# Altium PCB PCB1.PcbDoc
Units mil, origin at the board's own origin, x right, y up, seen from the top; angles counter-clockwise.
Board outline 2362.2 x 2362.2 mil, 2 copper layers (Top Layer, Bottom Layer); 25 components, 20 nets, 72 pads, 3 vias.
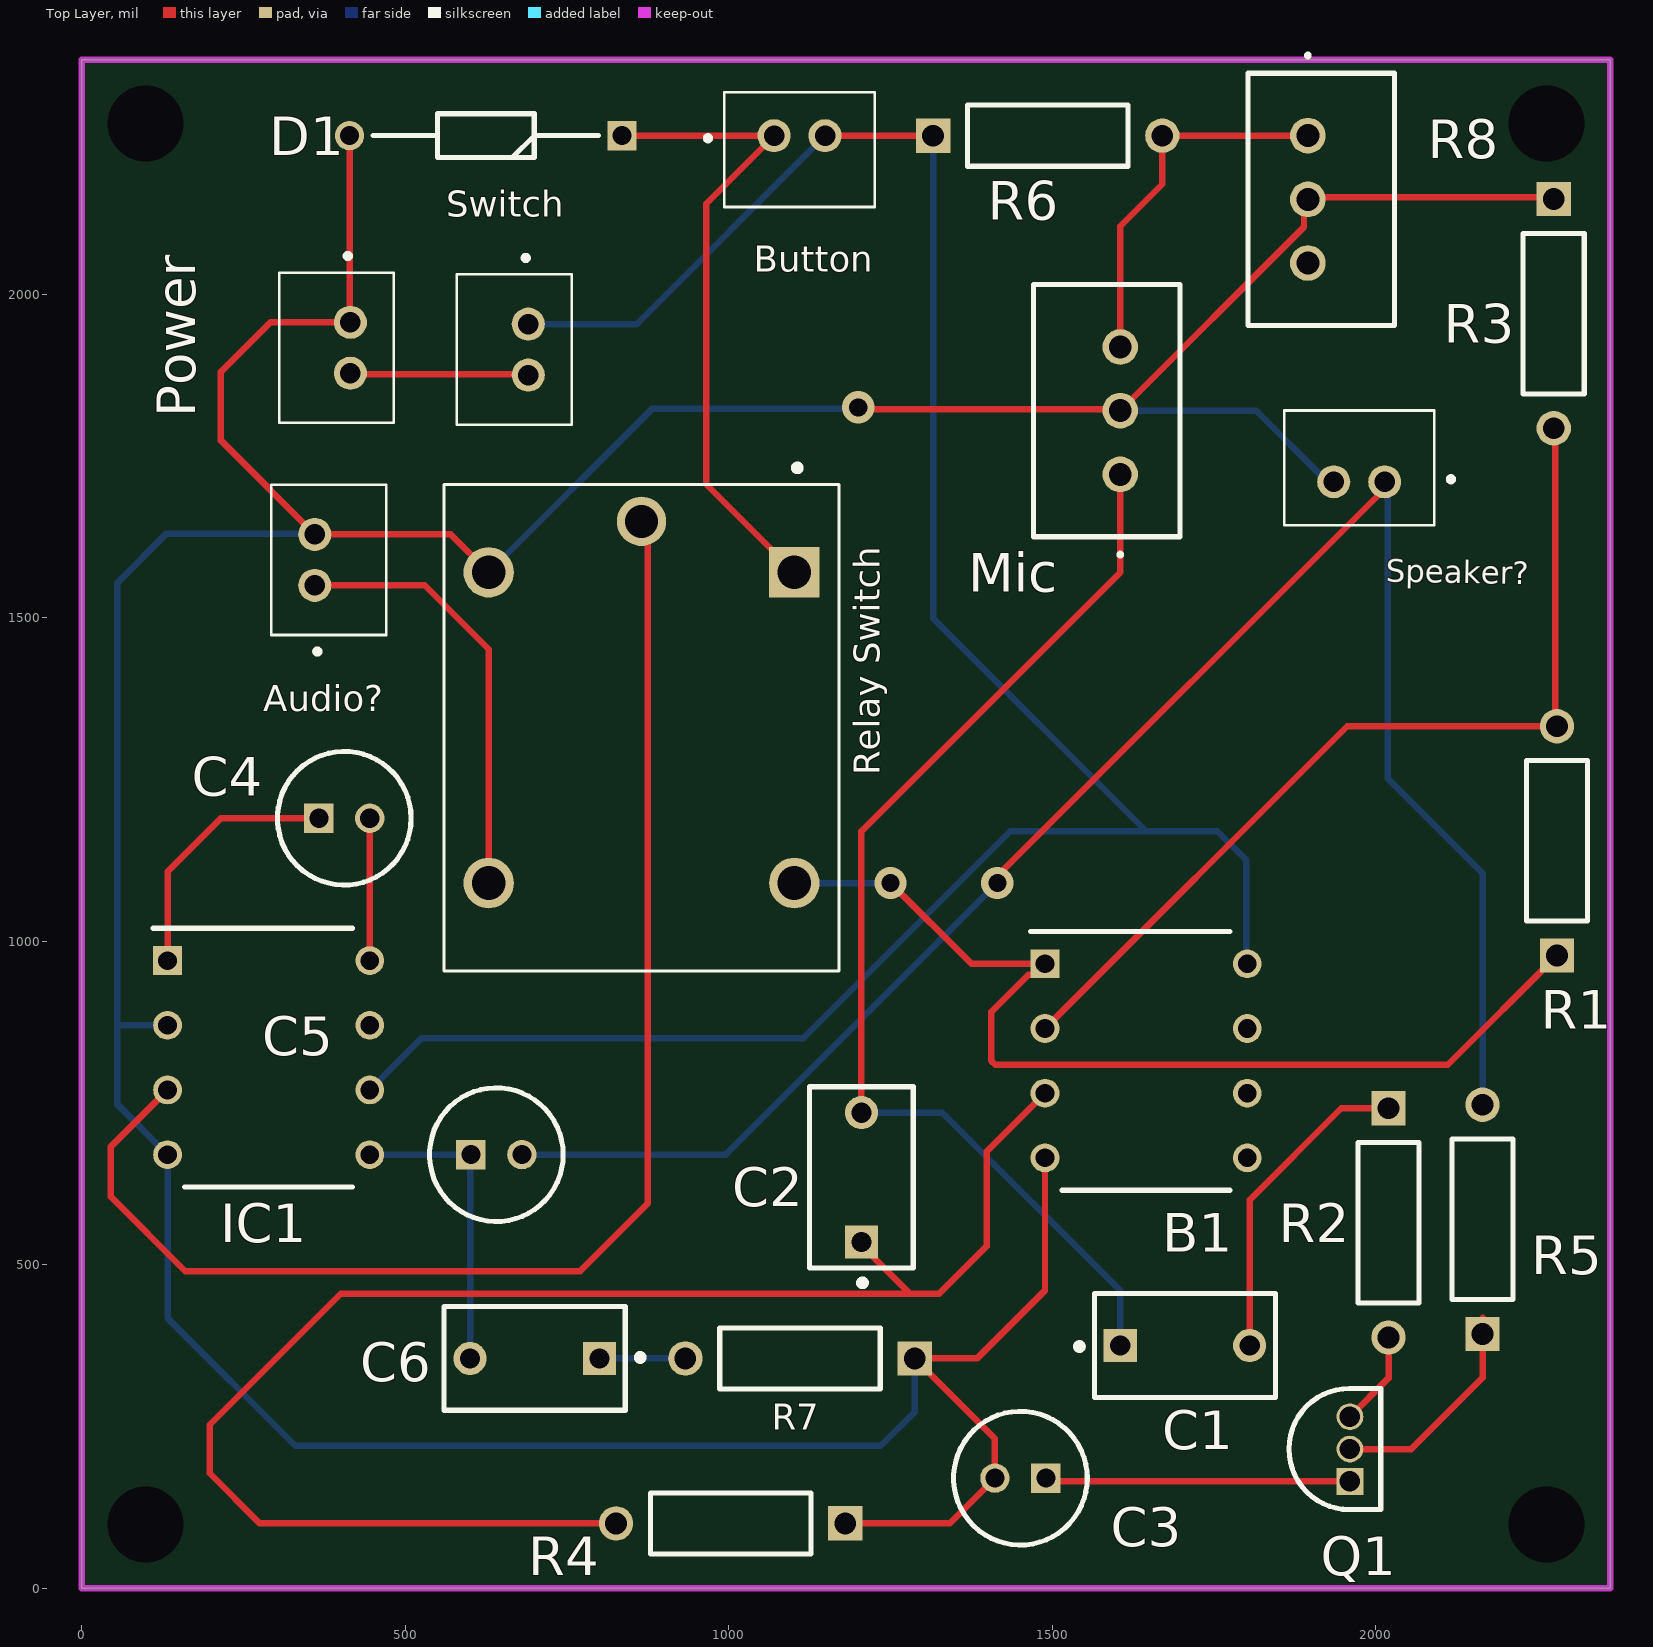
[diagram p0: Top Layer view]
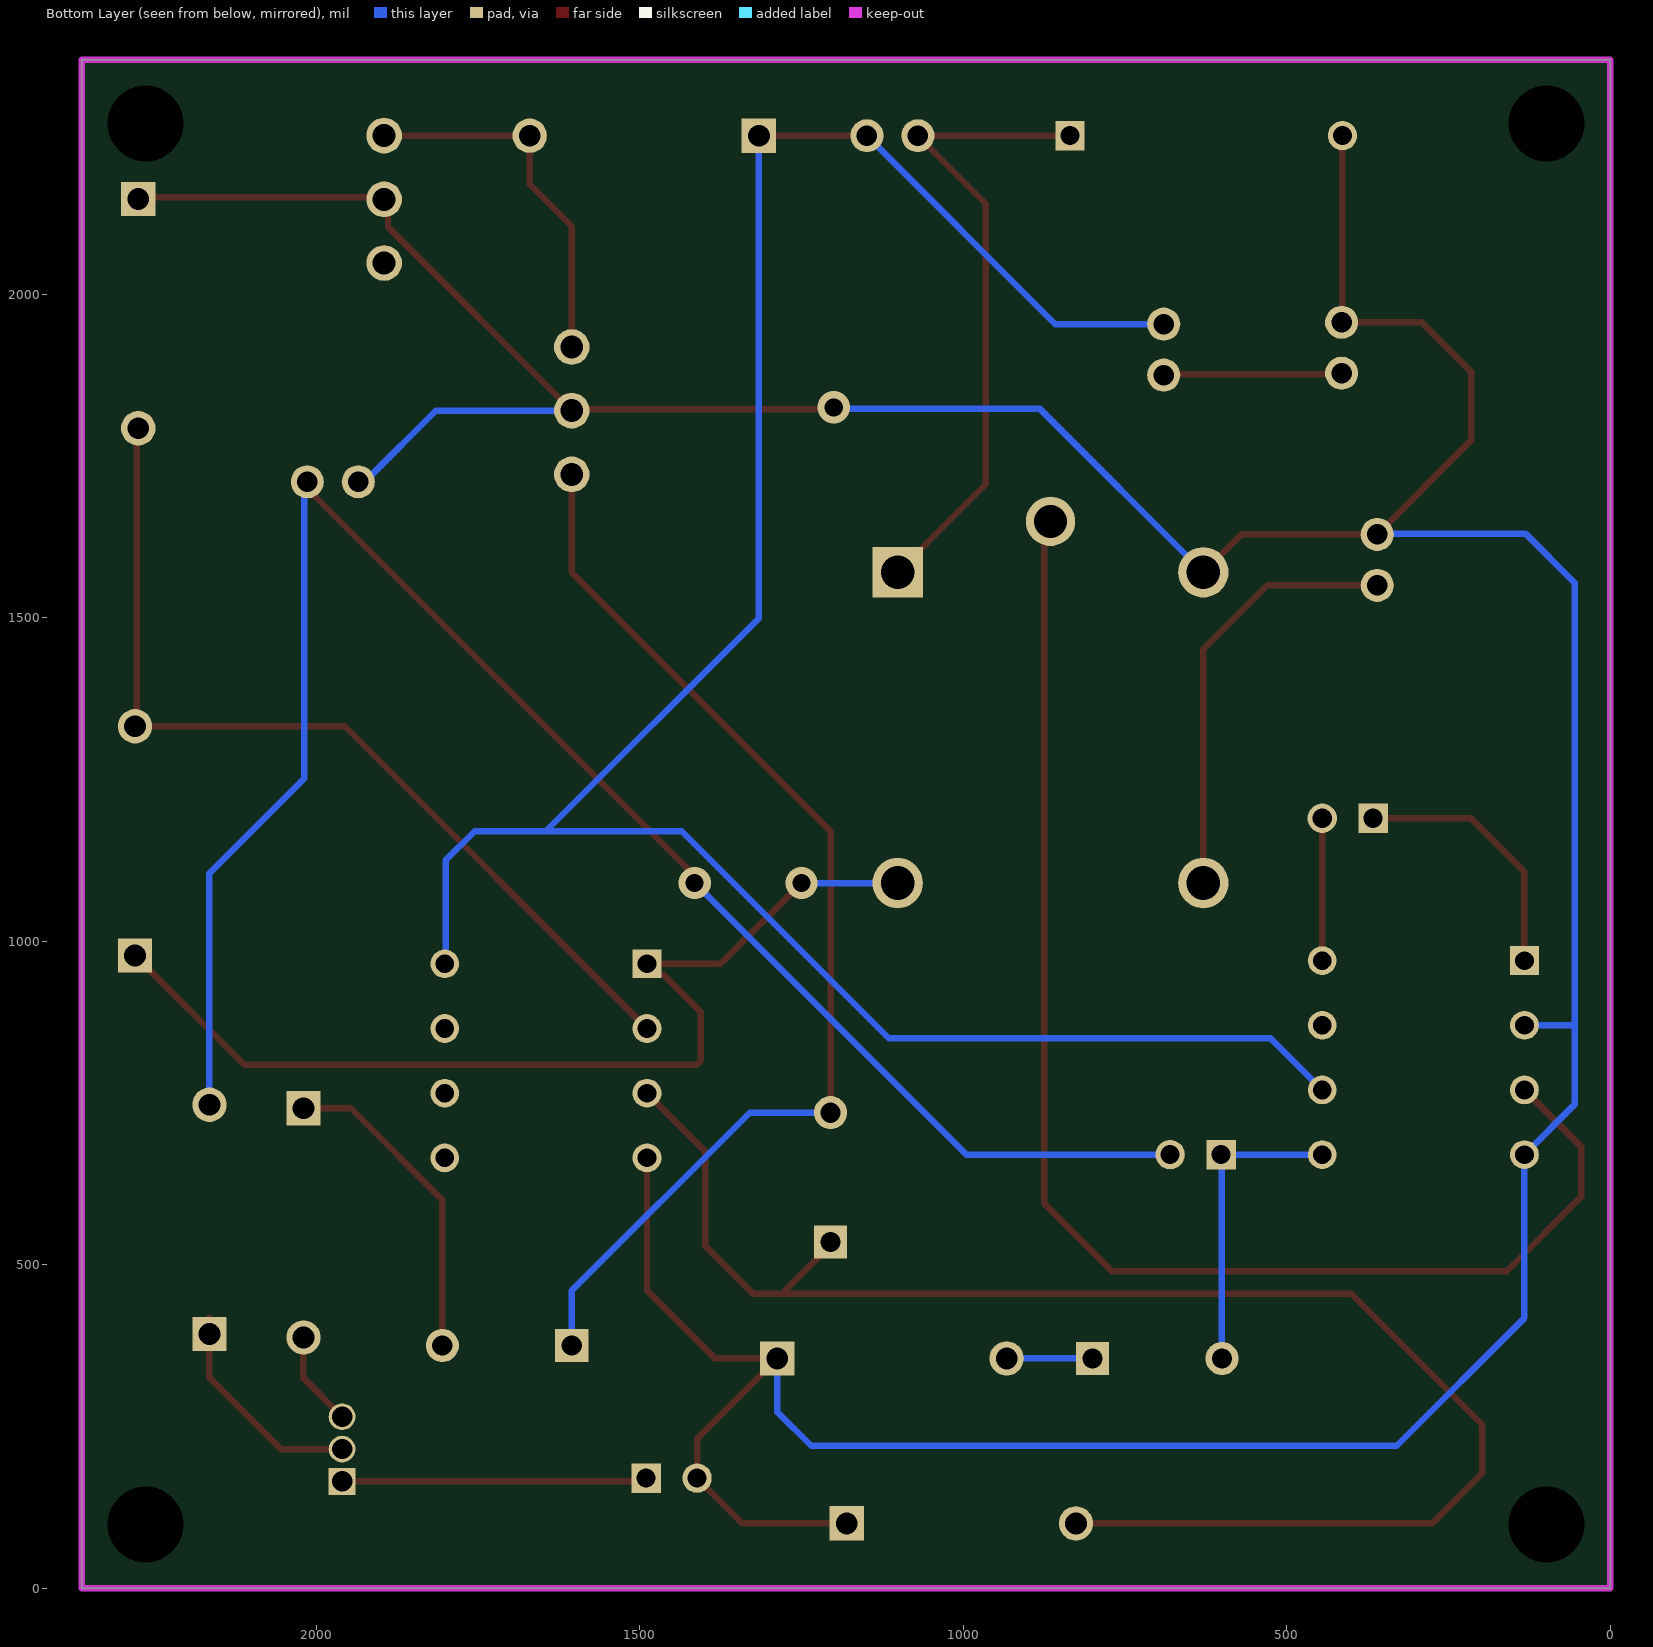
[diagram p1: Bottom Layer view, seen from below]
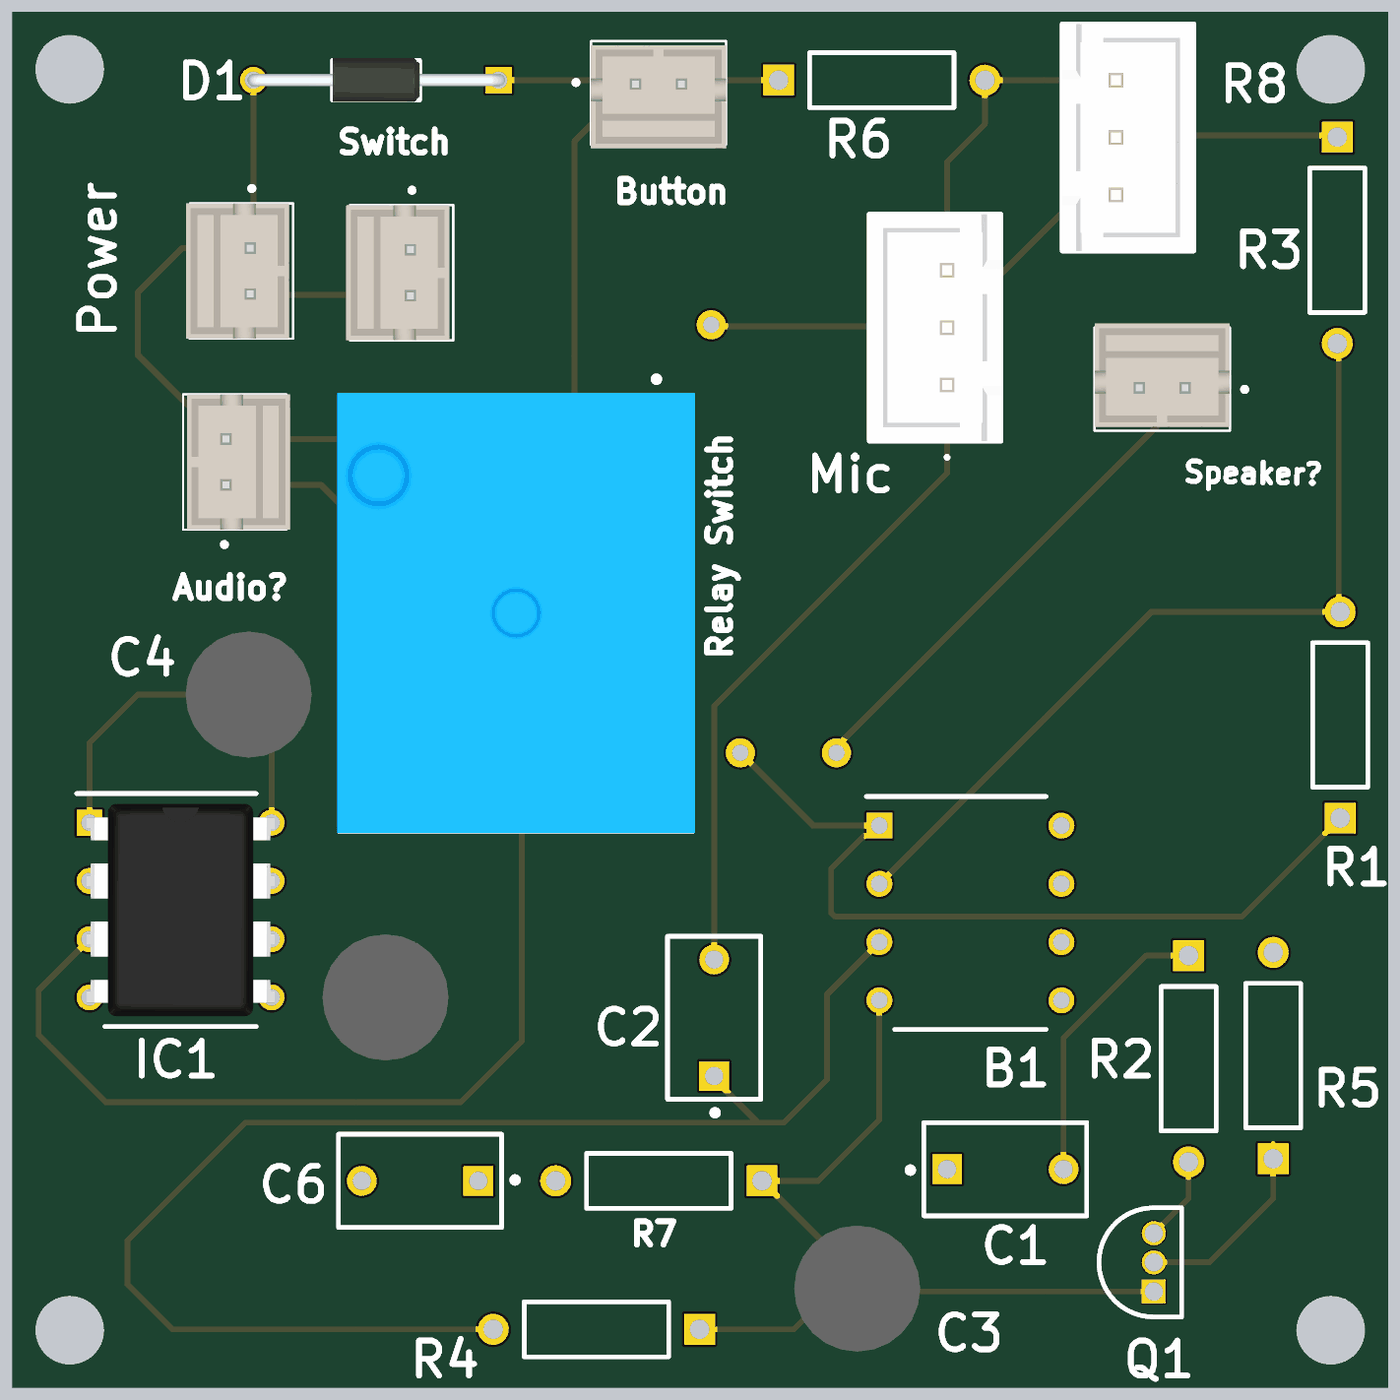
[diagram p2: 3D render of the assembled board from above, using the file's embedded part models]

## Layer stack, top to bottom
Top Solder: solder mask 0.4, Solder Resist, Dk 3.5
Top Layer: signal copper 1.4
Dielectric 1: dielectric 12.6, FR-4, Dk 4.8
Bottom Layer: signal copper 1.4
Bottom Solder: solder mask 0.4, Solder Resist, Dk 3.5

## Board outline
0,0 0,2362.2 2362.2,2362.2 2362.2,0

## Design rules (kind name [scope] priority, off if disabled: settings)
Clearance [All] p1: gap=10 ignorepadtopadclearanceinfootprint=FALSE except(0: Arc-Hole Track-Hole SMDPad-Hole THPad-Hole Via-Hole Fill-Hole Poly-Hole Region-Hole Text-Hole)
HoleSize [All] p1: absolutevalues=TRUE maxlimit=248.03 minlimit=0.98 maxpercent=80.000 minpercent=20.000
PolygonConnect [All] p1: connectstyle=Relief reliefconductorwidth=10 reliefentries=4 polygonreliefangle="90 Angle" airgapwidth=10
RoutingVias [All] p1: holewidth=28 width=50 viastyle="Through Hole" minholewidth=28 minwidth=50 maxholewidth=28 maxwidth=50
SolderMaskExpansion [All] p1: expansion=4 istentingtop=FALSE
Width [All] p1: maxlimit=10 minlimit=10 preferedwidth=10
29 further rules are at their usual default settings.

## Components (designator, comment, footprint, x,y, rotation, side; value= is the part's Value field where it differs from the comment)
Audio? "B2B-PH-K-S__LF__SN_" B2BPHKSLFSN 360,1550 r270 top
B1 "LM358P" DIP794W53P254L959H508Q8N#1 1645,815 r0 top
Button "B2B-PH-K-S__LF__SN_" B2BPHKSLFSN 1070,2245 r180 top
C1 "C330C105M5U5TA" KEMT-C330C105M5U5TA 1705,375 r0 top
C2 "C330C105M5U5TA" KEMT-C330C105M5U5TA 1205,635 r90 top
C3 "SD1E106M05011BB" CAPPRD200W55D525H1250 1490,170 r180 top
C4 "SD1E106M05011BB" CAPPRD200W55D525H1250 366.26,1190 r0 top
C5 "SD1E106M05011BB" CAPPRD200W55D525H1250 601.26,670 r0 top
C6 "C330C105M5U5TA" KEMT-C330C105M5U5TA 700,355 r180 top
D1 "1N4149TR" DIOAD1068W53L380D172 835,2245 r180 top
IC1 "LM386N" DIP794W53P254L959H508Q8N#2 288.7,820 r0 top
Mic "B3B-XH-A_LF__SN_" B3BXHALFSN 1605,1721.57 r90 top
Power "B2B-PH-K-S__LF__SN_" B2BPHKSLFSN 415,1956.57 r90 top
Q1 "2N3904BU" FAIR-TO-92 1960,165 r90 top
R1 "MFR-25FBF52-1K" RESA60-630X240 2280,1155 r90 top
R2 "MFR-25FBF52-1K" RESA60-630X240 2019.62,564.62 r270 top
R3 "MFR-25FBF52-1K" RESA60-630X240 2275,1970 r270 top
R4 "MFR-25FBF52-1K" RESA60-630X240 1002.83,100 r180 top
R5 "MFR-25FBF52-1K" RESA60-630X240 2165,570 r90 top
R6 "MFR-25FBF52-1K" RESA60-630X240 1492.83,2245 r0 top
R7 "MFR-25FBF52-1K" RESA60-630X240 1110,355 r180 top
R8 "B3B-XH-A_LF__SN_" B3BXHALFSN 1895,2245 r270 top
"Relay Switch" "SRD-05VDC-SL-C" RELAY_SRD-05VDC-SL-C 865,1330 r270 top
Speaker? "B2B-PH-K-S__LF__SN_" B2BPHKSLFSN 2013.74,1710 r0 top
Switch "B2B-PH-K-S__LF__SN_" B2BPHKSLFSN 690,1953.74 r90 top

## Footprints (in the part's own frame and the unit in brackets; to place one, negate y for a bottom-side part, rotate by r counter-clockwise, add the part's x,y. Pads: shape width x height; smd on the part's side, far side on the other; paste and mask are expansions set on the pad)
B2BPHKSLFSN [mm]
  round 1.3 hole 0.8: 1(0,0) 2(-2,0)
  silkscreen extent -3.95,-1.7 2.7,2.8, body extent -3.95,-1.53 1.95,2.97, height 5.91
B3BXHALFSN [mm]
  round 1.4 hole 0.9: 1(0,0) 2(2.5,0) 3(5,0)
  silkscreen extent -3.2,-2.35 7.45,3.4, body extent -2.45,-2.35 7.45,3.4, height 7.09
CAPPRD200W55D525H1250 [mm]
  rect 1.15x1.15 hole 0.75: 1(0,0)
  round 1.15 hole 0.75: 2(2,0)
  silkscreen extent -1.63,-2.62 3.62,2.62, body extent -1.74,-2.75 3.75,2.75, height 12.5
DIOAD1068W53L380D172 [mm]
  rect 1.15x1.15 hole 0.75: 1(0,0)
  round 1.15 hole 0.75: 2(10.7,0)
  silkscreen extent 0.92,-0.86 9.77,0.86, body extent -0.27,-0.95 10.95,0.95, height 1.91
DIP794W53P254L959H508Q8N#1 [mm]
  rect 1.13x1.13 / inner round 1.13 / far side rect 1.13x1.13 hole 0.73: 1(-3.97,3.81)
  round 1.13 hole 0.73: 2(-3.97,1.27) 3(-3.97,-1.27) 4(-3.97,-3.81) 5(3.97,-3.81) 6(3.97,-1.27) 7(3.97,1.27) 8(3.97,3.81)
  silkscreen extent -4.53,-5.08 3.3,5.08
DIP794W53P254L959H508Q8N#2 [mm]
  rect 1.13x1.13 hole 0.73: 1(-3.97,3.81)
  round 1.13 hole 0.73: 2(-3.97,1.27) 3(-3.97,-1.27) 4(-3.97,-3.81) 5(3.97,-3.81) 6(3.97,-1.27) 7(3.97,1.27) 8(3.97,3.81)
  silkscreen extent -4.53,-5.08 3.3,5.08, body extent -4.1,-4.64 4.1,4.64, height 4.21
FAIR-TO-92 [mm] "TO, 3-Leads, Body Dia 4.79mm, Pitch 1.27mm"
  rect 1.05x1.05 hole 0.8 mask+0.05: 1(0,0)
  round 1.05 hole 0.8 mask+0.05: 2(1.27,0) 3(2.54,0)
  silkscreen extent -1.11,-1.21 3.65,2.4, body extent -1.11,-1.21 3.65,2.4, height 5.33
KEMT-C330C105M5U5TA [mm] "THD, 2-Leads, Body 7.11x4.07mm"
  rect 1.3x1.3 hole 0.8: 1(-2.54,0)
  round 1.3 hole 0.8: 2(2.54,0)
  silkscreen extent -4.27,-2.03 3.55,2.03, body extent -3.55,-2.03 3.55,2.03, height 9.14
RELAY_SRD-05VDC-SL-C [mm]
  rect 1.98x1.98 / inner round 1.98 / far side rect 1.98x1.98 hole 1.32: A1(-6.1,6)
  round 1.98 hole 1.32: A2(-6.1,-6) NC(6.1,6) NO(6.1,-6)
  round 1.935 hole 1.29: COM(-8.1,0)
  silkscreen extent -10.3,-7.75 9.55,7.75, body extent -9.6,-7.8 9.6,7.8, height 15.8
RESA60-630X240 [mm] "Axial Resistor, 2-Leads, Dia 2.4mm, Body Length 6.3mm"
  rect 1.35x1.35 hole 0.85: 1(-4.5,0)
  round 1.35 hole 0.85: 2(4.5,0)
  silkscreen extent -3.15,-1.2 3.15,1.2, body extent -3.15,-1.2 3.15,1.2, height 2.4

## Part data
Audio? Button Power Speaker? Switch: "Circulator or Directional Coupler", Manufacturer_Name="JST (JAPAN SOLDERLESS TERMINALS)", Manufacturer_Part_Number="B2B-PH-K-S (LF)(SN)", Datasheet Link=http://www.jst-mfg.com/product/pdf/eng/ePH.pdf, Height=6mm
B1: "LM358P, Dual Operational Amplifier 0.7MHz 5 to 28V, 8-Pin PDIP", Manufacturer_Name="Texas Instruments", Mouser Part Number=595-LM358P, Datasheet Link=http://www.ti.com/lit/ds/symlink/lm358a.pdf, Geometry.Height=5.08mm, Manufacturer_Part_Number=LM358P, Mouser Price/Stock=https://www.mouser.co.uk/ProductDetail/Texas-Instruments/LM358P?qs=X1HXWTtiZ0QtOTT8%252BVnsyw%3D%3D
C1 C6: library part CMP-2000-06056-1, "Ceramic Capacitor, 1 uF, +/- 20%, 50 V, -10 to 85 degC, 2-Pin THD, RoHS, Bulk", Capacitance=47nF, Manufacturer=Kemet, Operating Temperature=10°C~85°C, Package / Case=Radial, Package Description="2-Pin Through Hole Device, Body 7.11 x 4.07 mm", Ratings=-, Standard Package=250, Temperature Coefficient=Z5U, Tolerance=±20%, Voltage - Rated=50V, Applications=GeneralPurpose, Catalog Drawings=C330(std), Category=Capacitors, Datasheet URL=http://www.kemet.com/Lists/ProductCatalog/Attachments/599/KEM_C1051_GOLDMAX_Z5U.pdf, Datasheet Version=12/2015, Family=CeramicCapacitors, Features=-, Height - Seated (Max)="0.360\"(9.14mm)", Lead Spacing="0.200\"(5.08mm)", Lead Style=Straight, Manufacturer URL=http://www.kemet.com/, Mounting Technology=ThroughHole, Mounting Type=ThroughHole, Online Catalog=GoldenMax™Series, Other Names=399-4390, Package Reference=C330C105M5U5TA, Packaging=Bulk, PCN Design/Specification=C3yySeriesGoldenMaxLeadConfiguration02/Feb/2015, Product Training Modules=CapacitorBasics-TypicalUsesforCapacitors, Series=GoldenMax™, Size / Dimension="0.300\"Lx0.150\"W(7.62mmx3.81mm)", Thickness (Max)=-
C2: library part CMP-2000-06056-1, "Ceramic Capacitor, 1 uF, +/- 20%, 50 V, -10 to 85 degC, 2-Pin THD, RoHS, Bulk", Capacitance=100nF, Manufacturer=Kemet, Operating Temperature=10°C~85°C, Package / Case=Radial, Package Description="2-Pin Through Hole Device, Body 7.11 x 4.07 mm", Ratings=-, Standard Package=250, Temperature Coefficient=Z5U, Tolerance=±20%, Voltage - Rated=50V, Applications=GeneralPurpose, Catalog Drawings=C330(std), Category=Capacitors, Datasheet URL=http://www.kemet.com/Lists/ProductCatalog/Attachments/599/KEM_C1051_GOLDMAX_Z5U.pdf, Datasheet Version=12/2015, Family=CeramicCapacitors, Features=-, Height - Seated (Max)="0.360\"(9.14mm)", Lead Spacing="0.200\"(5.08mm)", Lead Style=Straight, Manufacturer URL=http://www.kemet.com/, Mounting Technology=ThroughHole, Mounting Type=ThroughHole, Online Catalog=GoldenMax™Series, Other Names=399-4390, Package Reference=C330C105M5U5TA, Packaging=Bulk, PCN Design/Specification=C3yySeriesGoldenMaxLeadConfiguration02/Feb/2015, Product Training Modules=CapacitorBasics-TypicalUsesforCapacitors, Series=GoldenMax™, Size / Dimension="0.300\"Lx0.150\"W(7.62mmx3.81mm)", Thickness (Max)=-
C3 C4 C5: "Capacitor Polarised", Manufacturer_Name=SAMWHA, Datasheet Link=https://www.tme.eu/Document/d3dd2092f3e0a8bc90045cfef03351bc/SD.pdf, Height=12.5mm, Manufacturer_Part_Number=SD1E106M05011BB
D1: "Diode", Manufacturer_Name=onsemi, Mouser Part Number=512-1N4149TR, Arrow Part Number=1N4149TR, Arrow Price/Stock=https://www.arrow.com/en/products/1n4149tr/on-semiconductor?utm_currency=USD&region=nac, Datasheet Link=https://www.onsemi.com/pub/Collateral/1N4149-D.PDF, Manufacturer_Part_Number=1N4149TR, Mouser Price/Stock=https://www.mouser.co.uk/ProductDetail/onsemi-Fairchild/1N4149TR?qs=VZOZQ19d7%2FIpYVTk5v1ckw%3D%3D
IC1: "Integrated Circuit", Manufacturer_Name="Texas Instruments", Mouser Part Number=595-LM386N, Datasheet Link=http://www.ti.com/lit/ds/symlink/lm386.pdf, Height=5.08mm, Manufacturer_Part_Number=LM386N, Mouser Price/Stock=https://www.mouser.co.uk/ProductDetail/Texas-Instruments/LM386N?qs=E2%2FxqS9xjzoJP%2FIW26Y6YA%3D%3D
Mic R8: "Connector", Arrow Part Number=B3B-XH-A(LF)(SN), Manufacturer_Name="JST (JAPAN SOLDERLESS TERMINALS)", Mouser Part Number=306-B3BXHALFSNP, Arrow Price/Stock=https://www.arrow.com/en/products/b3b-xh-a-lf-sn/jst-manufacturing?utm_currency=USD&region=europe, Datasheet Link=https://datasheet.lcsc.com/szlcsc/1812131720_JST-Sales-America-B3B-XH-A-LF-SN_C144394.pdf, Height=7mm, Manufacturer_Part_Number=B3B-XH-A(LF)(SN), Mouser Price/Stock=https://www.mouser.co.uk/ProductDetail/JST-Commercial/B3B-XH-ALFSN?qs=cdbOS8ANM9BVkoboCCIEMQ%3D%3D
Q1: library part CMP-2000-04944-1, "NPN General-Purpose Amplifier, 40 V VCEO, 0.2 A, -55 to 150 degC, 2-Pin TO-92, RoHS, Bulk", Manufacturer=FairchildSemiconductor, Maximum Collector Base Voltage=60V, Maximum Collector Emitter Saturation Voltage=0.2@1mA@10mA|0.3@5mA@50mAV, Maximum Collector Emitter Voltage=40V, Maximum DC Collector Current=0.2A, Maximum Operating Frequency=300(Min)MHz, Maximum Power Dissipation=625mW, Minimum DC Current Gain=40@0.1mA@1V|70@1mA@1V|100@10mA@1V|60@50mA@1V|30@100mA@1V, Operating Temperature=-55to150degC, Package=3TO-92, Package Description="3-Pin Transistor Outline Package, Body Dia 4.79 mm, Pitch 1.27 mm", Package Reference=TO-92, Category=GPBJT, Datasheet URL=https://datasheet.ciiva.com/4722/2n3904-82270-4722369.pdf, Datasheet Version="Rev. 1.1.0, 10/2014", Manufacturer URL=https://www.fairchildsemi.com/, Mounting=ThroughHole, Packaging=Bulk, Pin Count=3, Rad Hard=No, Type=NPN
R1 R2: library part CMP-1659-00075-1, "Axial Resistor, 1 KOhm, +/- 1%, 250 mW, -55 to 155 degC, 2-Pin THD, RoHS, Bulk", Case\Package=Axial, Max Operating Temperature="155 degC", Min Operating Temperature="-55 degC", Package Quantity=200, Power Rating="250 mW", Resistance=100k, Tolerance=1%, Voltage Rating="250 V", ComponentLink1Description="Manufacturer URL", ComponentLink1URL=http://www.yageo.com/, ComponentLink2Description=Datasheet, ComponentLink2URL=http://www.yageo.com/documents/recent/Yageo%20LR_MFR_2013.pdf, DatasheetVersion=Apr-13, Length="0.248 inch", PackageDescription="2-Pin Axial Lead, Dia 2.4 mm, Body Length 6.3 mm", PackageReference=MFR-25, Packaging=Bulk, RoHSCompliant=true
R3: library part CMP-1659-00075-1, "Axial Resistor, 1 KOhm, +/- 1%, 250 mW, -55 to 155 degC, 2-Pin THD, RoHS, Bulk", Case\Package=Axial, Max Operating Temperature="155 degC", Min Operating Temperature="-55 degC", Package Quantity=200, Power Rating="250 mW", Resistance=1k, Tolerance=1%, Voltage Rating="250 V", ComponentLink1Description="Manufacturer URL", ComponentLink1URL=http://www.yageo.com/, ComponentLink2Description=Datasheet, ComponentLink2URL=http://www.yageo.com/documents/recent/Yageo%20LR_MFR_2013.pdf, DatasheetVersion=Apr-13, Length="0.248 inch", PackageDescription="2-Pin Axial Lead, Dia 2.4 mm, Body Length 6.3 mm", PackageReference=MFR-25, Packaging=Bulk, RoHSCompliant=true
R4 R5 R6: library part CMP-1659-00075-1, "Axial Resistor, 1 KOhm, +/- 1%, 250 mW, -55 to 155 degC, 2-Pin THD, RoHS, Bulk", Case\Package=Axial, Max Operating Temperature="155 degC", Min Operating Temperature="-55 degC", Package Quantity=200, Power Rating="250 mW", Resistance=10k, Tolerance=1%, Voltage Rating="250 V", ComponentLink1Description="Manufacturer URL", ComponentLink1URL=http://www.yageo.com/, ComponentLink2Description=Datasheet, ComponentLink2URL=http://www.yageo.com/documents/recent/Yageo%20LR_MFR_2013.pdf, DatasheetVersion=Apr-13, Length="0.248 inch", PackageDescription="2-Pin Axial Lead, Dia 2.4 mm, Body Length 6.3 mm", PackageReference=MFR-25, Packaging=Bulk, RoHSCompliant=true
R7: library part CMP-1659-00075-1, "Axial Resistor, 1 KOhm, +/- 1%, 250 mW, -55 to 155 degC, 2-Pin THD, RoHS, Bulk", Case\Package=Axial, Max Operating Temperature="155 degC", Min Operating Temperature="-55 degC", Package Quantity=200, Power Rating="250 mW", Resistance=10, Tolerance=1%, Voltage Rating="250 V", ComponentLink1Description="Manufacturer URL", ComponentLink1URL=http://www.yageo.com/, ComponentLink2Description=Datasheet, ComponentLink2URL=http://www.yageo.com/documents/recent/Yageo%20LR_MFR_2013.pdf, DatasheetVersion=Apr-13, Length="0.248 inch", PackageDescription="2-Pin Axial Lead, Dia 2.4 mm, Body Length 6.3 mm", PackageReference=MFR-25, Packaging=Bulk, RoHSCompliant=true
"Relay Switch": "5V Trigger Relay Module For Arduino And Raspberry Pi 5V Trigger Relay Module For Arduino And Raspberry Pi", Package="NON STANDARD-5 Songle Relay", Availability="Not in stock", Check_prices=https://www.snapeda.com/parts/SRD-05VDC-SL-C/Songle+Relay/view-part/?ref=eda, MF="Songle Relay", MP=SRD-05VDC-SL-C, Price=None, SnapEDA_Link=https://www.snapeda.com/parts/SRD-05VDC-SL-C/Songle+Relay/view-part/?ref=snap

## Free pads (board coordinates)
  round 60 hole 118.11 unplated: 8(98.43,98.43) 8(98.43,2263.78) 8(2263.78,98.43) 8(2263.78,2263.78)

## Via types
v1: diameter 50, hole 28, Top Layer to Bottom Layer, 3 vias

## Nets (pads, with @x,y where several pads share a name; then routed paths per layer and width w, separated by ;. In a path a pad name is that pad's centre, name@x,y a point inside that pad or via, vN(x,y) a via of type N, cw(c..) or ccw(c..) an arc to the next point about the centre after c; other vN are vias at no path point)
+Input: "Relay Switch.COM" IC1.3 | length 2180.4
  Top Layer w10: IC1.3 45,682.6 45,605 160,490 770,490 875,595 875,1638.9 865,1648.9
GND: "Relay Switch.A2" Audio?.2 B1.4 C3.2 D1.2 IC1.2 IC1.4 Mic.2 Power.1 R3.1 R4.1 R7.1 R8.2 Speaker?.2 | length 7259.5
  Top Layer w10: Audio?.2 215,1773.74 215,1880 291.57,1956.57 Power.1 ; Audio?.2@373.13,1634.63 379.02,1628.74 570.2,1628.74 628.78,1570.16 ; D1.2 413.74,1957.2 Power.1@414.37,1956.57 ; R4.1 1341.26,100 C3.2 1411.26,230.91 R7.1 1383.7,355 1488.7,460 B1.4 ; v1(1200,1825) 1202.5,1822.5 1602.5,1822.5 Mic.2 1889.02,2104.02 1889.02,2140.59 R8.2 ; R8.2@1895,2150 2272.17,2150 R3.1
  Bottom Layer w10: IC1.2 55,870 ; Audio?.2@360,1630 130.86,1630 55,1554.14 55,870 ; 628.78,1570.16 881.91,1823.28 1198.28,1823.28 v1(1200,1825) ; R7.1 1287.17,272.17 1235,220 330,220 132.4,417.6 IC1.4 55,747.4 55,870 ; Mic.2 1815,1820 1920,1715 Speaker?.2@1920,1710
Microphone+: C1.1 C2.2 Mic.1 | length 1751.2
  Top Layer w10: C2.2 1205,1170 1605,1570 Mic.1
  Bottom Layer w10: C2.2 1330,735 1605,460 C1.1
NetAudio?_1: "Relay Switch.NO" Audio?.1 | length 671.1
  Top Layer w10: Audio?.1 530,1550 628.78,1451.22 628.78,1089.84
NetB1_2: B1.2 R1.2 R3.2 | length 1447.5
  Top Layer w10: B1.2 1955.87,1332.17 R1.2 2277.5,1334.67 2277.5,1790.33 R3.2
NetB1_3: B1.3 C2.1 R4.2 | length 2430.5
  Top Layer w10: R4.2 275,100 197.59,177.41 197.59,252.59 400,455 1280,455 ; C2.1@1205,530 1280,455 ; B1.3 1398.7,675 1398.7,528.7 1325,455 1280,455
NetButton_1: "Relay Switch.A1" Button.1 D1.1 | length 1009.8
  Top Layer w10: D1.1 1055,2245 Button.1 965,2140 965,1706.38 1101.22,1570.16
NetC1_2: C1.2 R2.1 | length 498.3
  Top Layer w10: C1.2 1805,600 1946.78,741.78 R2.1
NetC3_1: C3.1 Q1.1 | length 472.1
  Top Layer w10: C3.1 1495,165 Q1.1
NetC4_1: C4.1 IC1.1 | length 405.5
  Top Layer w10: IC1.1 132.4,1107.4 215,1190 C4.1
NetC4_2: C4.2 IC1.8 | length 220
  Top Layer w10: IC1.8 C4.2
NetC5_1: C5.1 C6.2 IC1.5 | length 471.8
  Bottom Layer w10: IC1.5 C5.1 600,668.74 C6.2
NetC6_1: C6.1 R7.2 | length 132.8
  Bottom Layer w10: C6.1 R7.2
NetMic_3: Mic.3 R6.2 R8.1 | length 578.5
  Top Layer w10: Mic.3 1605,2105 1670,2170 R6.2 R8.1
NetPower_2: Power.2 Switch.2 | length 276.2
  Top Layer w10: Power.2 416.42,1876.42 688.58,1876.42 Switch.2
NetQ1_2: Q1.2 R5.1 | length 338.4
  Top Layer w10: Q1.2@1965,215 2055,215 2165,325 R5.1 R5.1@2165,417.83
NetQ1_3: Q1.3 R2.2 | length 147.1
  Top Layer w10: Q1.3 2019.71,324.71 R2.2@2019.71,387.37
Speaker+: C5.2 R5.2 Speaker?.1 | length 2802.5
  Top Layer w10: v1(1415,1090) 1415,1100.63 2018.43,1704.06 Speaker?.1@2018.43,1710
  Bottom Layer w10: C5.2 995,670 v1(1415,1090) ; Speaker?.1@2018.43,1710 2018.43,1251.57 2165,1105 R5.2
VCC: B1.8 Button.2 IC1.6 R6.1 Switch.1 | length 3654.7
  Top Layer w10: Switch.1@688.74,1955 Switch.1 ; Button.2@1153.43,2245 R6.1
  Bottom Layer w10: IC1.6 525,850 1115,850 1435,1170 1645,1170 ; Switch.1 857.48,1953.74 Button.2 ; R6.1 1315.67,1499.33 1645,1170 ; B1.8 1800,966.3 1800,1125 1755,1170 1645,1170
VOUT: "Relay Switch.NC" B1.1 R1.1 | length 1571.6
  Top Layer w10: v1(1250,1090) 1375,965 B1.1@1480,965 ; B1.1 B1.1@1480,965 ; R1.1 2111.21,809.04 1411.82,809.04 1405.96,814.9 1405.96,890.96 1462.76,947.76 1471.46,947.76 1480,956.3 B1.1@1480,965
  Bottom Layer w10: 1101.22,1089.84 1249.84,1089.84 v1(1250,1090)
pads on no net: B1.5 B1.6 B1.7 IC1.7 R8.3

## Keep-outs
Keep-Out Layer:
  the board outline again, w10